# EAGLE board geiger (EAGLE 7.5.0)
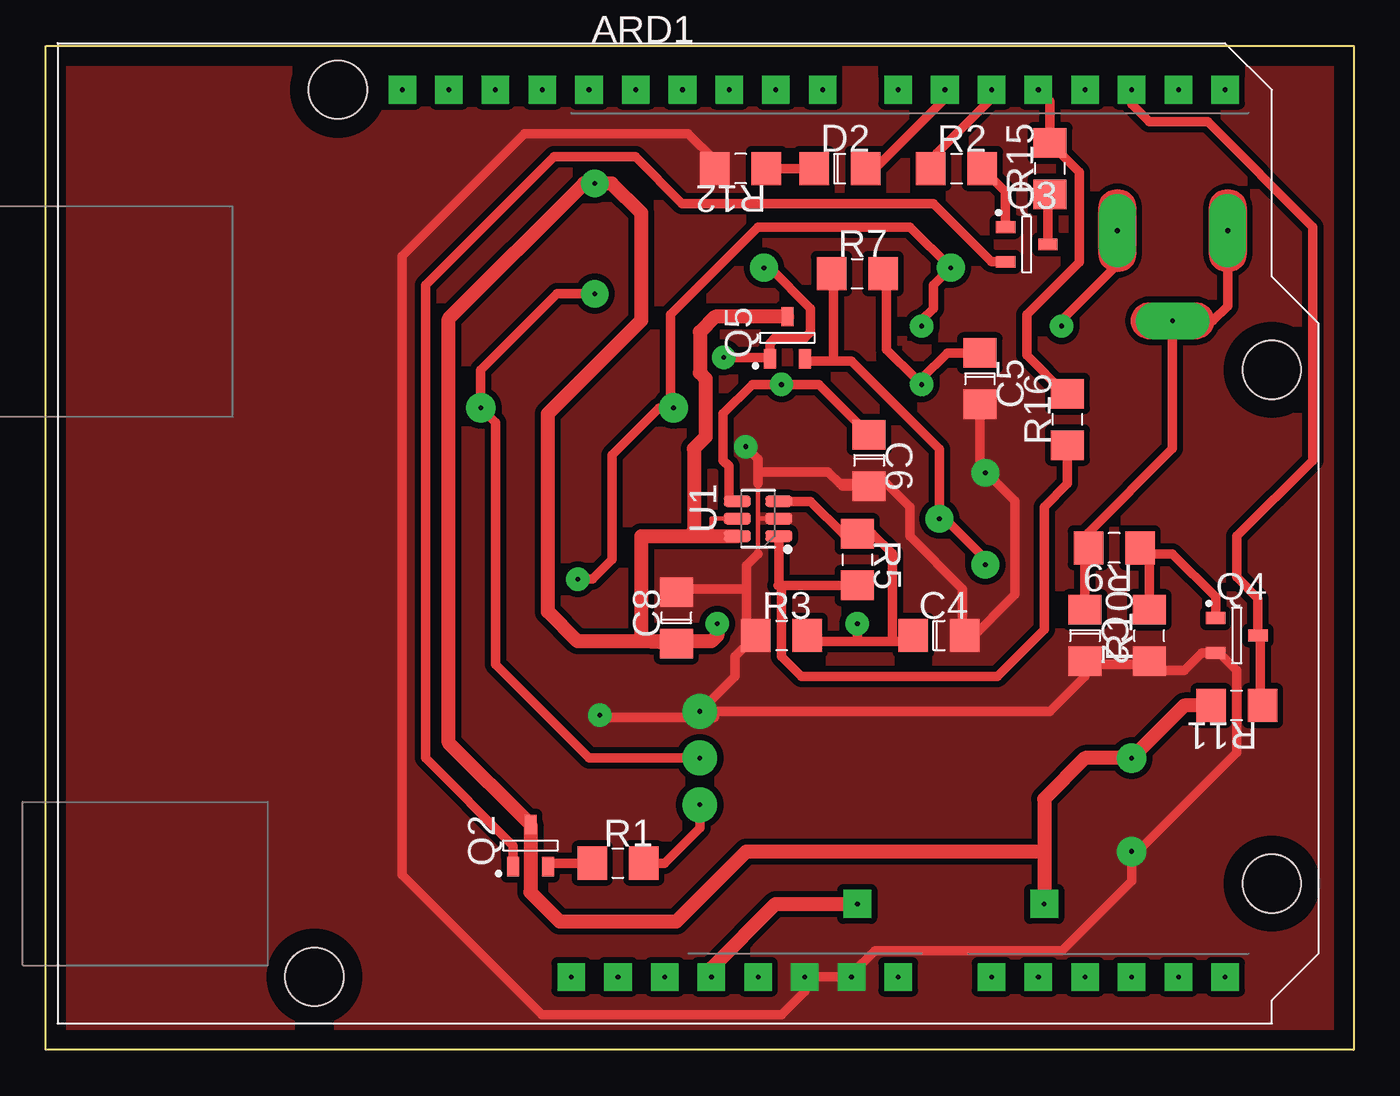
[diagram p0: board, top side]
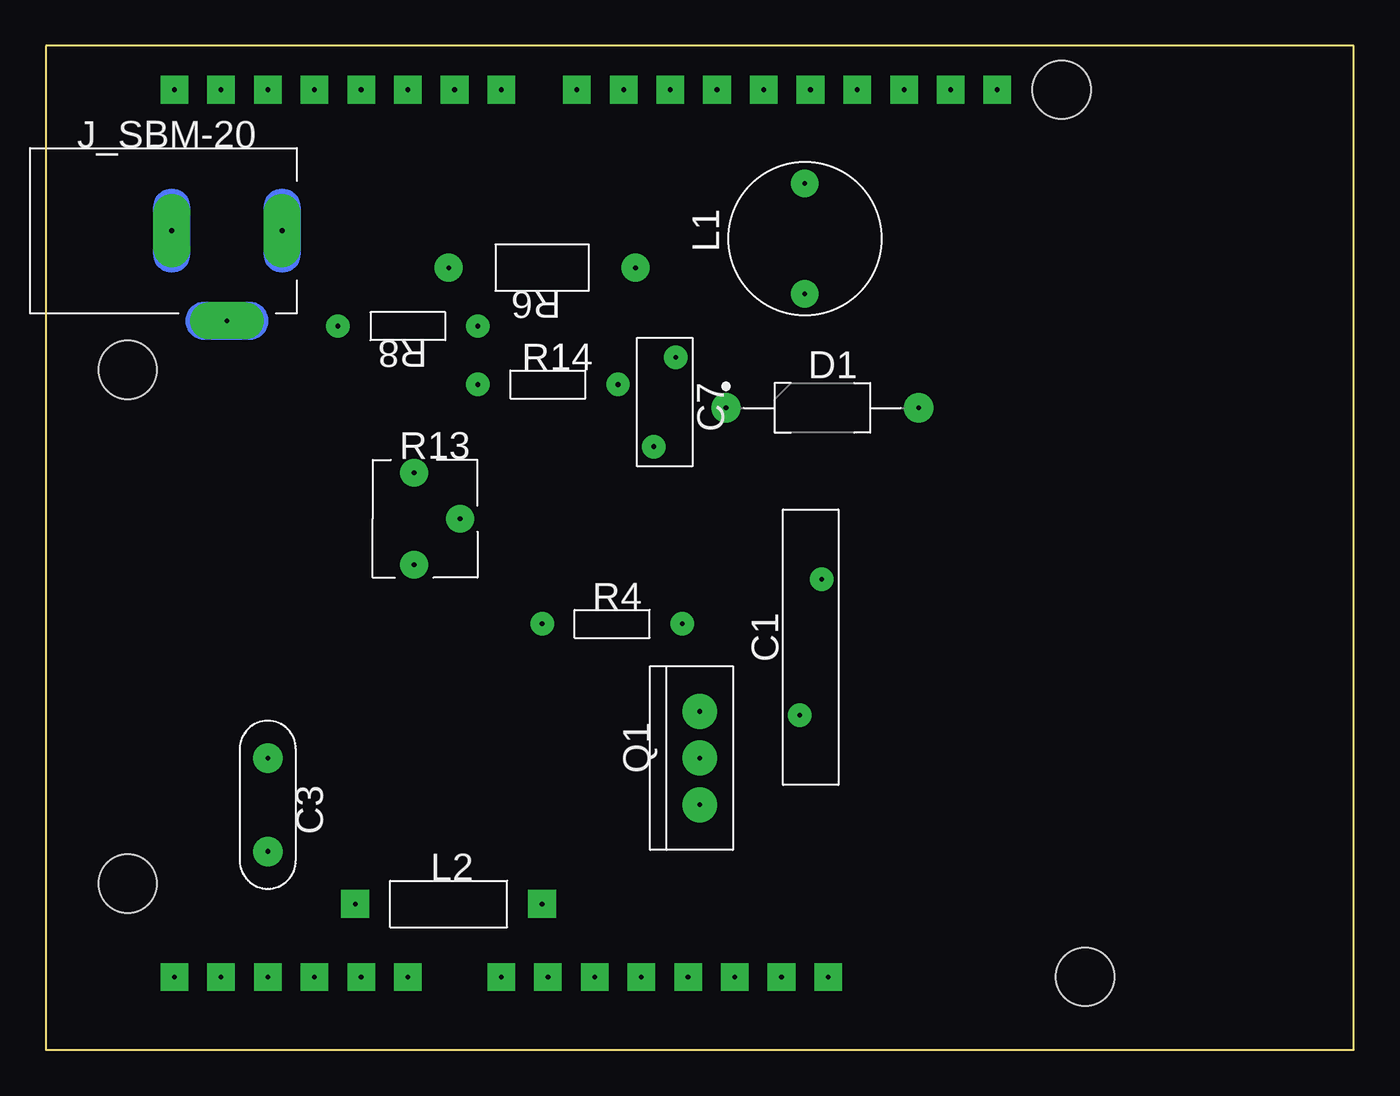
[diagram p1: board, bottom side, seen from below]

Size 71.12 x 54.61 mm. Coordinates in mm from the lower left corner, seen from the top.
Outline: 0,54.61 71.12,54.61 71.12,0 0,0 0,54.61
Copper layers (1*16): Top 0.035mm / dielectric 1.5mm / Bottom 0.035mm
Design rules "default *": minimum track width 10mil, minimum drill 0.61mm, track to track 8mil, track to pad 8mil, pad to pad 8mil, via to via 8mil, smd to smd 8mil, copper to edge 40mil, drill to drill 8mil, minimum pad ring 0mil, minimum via ring 8mil, stop-mask expansion 2mil, vias tented up to drill 19mil, thermal gap 10mil
Net classes: 0 Default: width 0.508 mm, clearance 0.33 mm, clearance 0.33 mm to class 1, clearance 0.33 mm to class 2; 1 VCC: width 0.762 mm, clearance 0.33 mm, clearance 0.33 mm to class 0, clearance 0.33 mm to class 2; 2 HI_VOLTAGE: width 0.508 mm, clearance 0.635 mm, clearance 0.635 mm to class 0, clearance 0.635 mm to class 1

## Footprints (pad centres in the part's own frame; a part is rotated, then mirrored left to right if it is on the bottom)
ADRUINO_UNO = drill 0.254 pad 1.5 square: 0 27.94,24.13; 1 25.4,24.13; 2 22.86,24.13; 3 20.32,24.13; 3.3V 0,-24.13; 4 17.78,24.13; 5 15.24,24.13; 5V 2.54,-24.13; 6 12.7,24.13; 7 10.16,24.13; 8 6.045,24.13; 9 3.505,24.13; 10 0.965,24.13; 11 -1.575,24.13; 12 -4.115,24.13; 13 -6.655,24.13; A0 15.24,-24.13; A1 17.78,-24.13; A2 20.32,-24.13; A3 22.86,-24.13; A4 25.4,-24.13; A5 27.94,-24.13; AREF -11.76,24.13; GND1 -9.195,24.13; GND2 5.08,-24.13; GND3 7.62,-24.13; IOREF -5.08,-24.13; N.C. -7.62,-24.13; RESET -2.54,-24.13; SCL -16.815,24.13; SDA -14.275,24.13; VIN 10.16,-24.13 | hole 3.175: -21.59,-24.13; -20.32,24.13; 30.48,-19.05; 30.48,8.89
CAPRB740W60L1500T300H1800 = drill 0.254 pad 1.28: 1 -3.702,0.6; 2 3.702,-0.6
CAP_1206 = smd 1.6 x 1.8: 1 -1.4,0; 2 1.4,0
CAP-5.08/9.15x3 = drill 0.254 pad 1.6: 1 -2.54,0; 2 2.54,0
CAPRB485W60L700T300H1000 = drill 0.254 pad 1.28: 1 -2.427,0.6; 2 2.427,-0.6
DIOAD1048W78L520D270_AD2 = drill 0.254 pad 1.59: 1 -5.24,0; 2 5.24,0
DIO_1206 = smd 1.6 x 1.8: 1 -1.4,0; 2 1.4,0
4840-2211 = drill 0.254 pad 2 long: 1 3,1.7; 2 -3,1.7; 3 0,-3.2
BOURNS_6100-100K = drill 0.254 pad 1.5: 1 -3,0; 2 3,0
IND_400 = drill 0.254 pad 1.524 square: 1 -5.08,0; 2 5.08,0
TO-220 = drill 0.254 pad 1.9: 1 -2.54,0; 2 0,0; 3 2.54,0
SOT23 = smd 1.05 x 0.65: 1 -1.15,0.95; 2 -1.15,-0.95; 3 1.15,0
RES_1206 = smd 1.6 x 1.8: 1 -1.4,0; 2 1.4,0
RES-7.62/4x1.5 = drill 0.254 pad 1.27: 1 -3.81,0; 2 3.81,0
RES-10.16/5.1x2.5 = drill 0.254 pad 1.524: 1 -5.08,0; 2 5.08,0
306X = drill 0.254 pad 1.5: 1 -1.25,2.5; 2 1.25,0; 3 -1.25,-2.5
SOT23-6P95_270X145L35X35M = smd 0.62 x 1.46: 1 -0.95,-1.125; 2 0,-1.125; 3 0.95,-1.125; 4 0.95,1.125; 5 0,1.125; 6 -0.95,1.125

## Placement (x,y rotation side)
ARD1  ARDUINO UNO  [ADRUINO_UNO]  36.2,28.1 0 top
C1  .005u  [CAPRB740W60L1500T300H1800]  29.53,21.91 90 bottom
C2  220pF  [CAP_1206]  56.52,22.54 270 top
C3  220u  [CAP-5.08/9.15x3]  59.06,13.33 270 bottom
C4  104  [CAP_1206]  48.58,22.54 0 top
C5  1n  [CAP_1206]  50.8,36.51 270 top
C6  1n  [CAP_1206]  44.77,32.07 270 top
C7  0.1uF  [CAPRB485W60L700T300H1000]  37.47,35.24 270 bottom
C8  1u  [CAP_1206]  34.29,23.49 90 top
D1  1N4937G  [DIOAD1048W78L520D270_AD2]  28.89,34.92 0 bottom
D2  LED_1206  [DIO_1206]  43.18,47.94 0 top
J_SBM-20  644456-2  [4840-2211]  61.28,42.86 360 bottom
L1  6100-103K-RC  [BOURNS_6100-100K]  29.85,44.13 90 bottom
L2  100nH  [IND_400]  49.21,7.94 0 bottom
Q1  FJP5027RTU  [TO-220]  35.56,15.87 90 bottom
Q2  MMBT3904  [SOT23]  26.35,11.11 90 top
Q3  MMBT3904  [SOT23]  53.34,43.82 0 top
Q4  MMBT3904  [SOT23]  64.77,22.54 0 top
Q5  MMBT3904  [SOT23]  40.32,38.74 90 top
R1  220  [RES_1206]  31.12,10.16 0 top
R2  100k  [RES_1206]  49.53,47.94 0 top
R3  100k  [RES_1206]  40.01,22.54 0 top
R4  100k  [RES-7.62/4x1.5]  40.32,23.18 360 bottom
R5  10M  [RES_1206]  44.13,26.67 270 top
R6  5GOhm  [RES-10.16/5.1x2.5]  44.13,42.54 180 bottom
R7  1M  [RES_1206]  44.13,42.23 0 top
R8  4.7M  [RES-7.62/4x1.5]  51.44,39.37 180 bottom
R9  22k  [RES_1206]  58.1,27.3 180 top
R10  100k  [RES_1206]  60.01,22.54 90 top
R11  10k  [RES_1206]  64.77,18.73 180 top
R12  220  [RES_1206]  37.78,47.94 180 top
R13  500k  [306X]  49.85,28.89 0 bottom
R14  1M  [RES-7.62/4x1.5]  43.82,36.19 360 bottom
R15  1k  [RES_1206]  54.61,47.94 90 top
R16  1  [RES_1206]  55.56,34.29 90 top
U1  OPA341NA  [SOT23-6P95_270X145L35X35M]  38.73,28.89 90 top

## Library data of the parts
ARD1 C2 C4-C6 C8 D2 R1-R5 R7-R12 R14-R16 U1 = common
C1 = common; DATASHEET: http://datasheets.diptrace.com/vishay/HAE.pdf; MANUFACTURER: Vishay; PART_NUMBER_(DIGI-KEY): HAE103MBABF0KR-ND; PART_NUMBER_(LCSC): C1638345; UNIQUE_NAME: VISHAY_HAE_7.5X1.2_15X3_CAP
C3 = common; UNIQUE_NAME: CAP-5.08/9.15x3
C7 = common; DATASHEET: http://datasheets.diptrace.com/vishay/HAE.pdf; MANUFACTURER: Vishay; PART_NUMBER_(DIGI-KEY): HAE102MBABF0KR-ND; PART_NUMBER_(LCSC): C1631824; UNIQUE_NAME: VISHAY_HAE_5X1.2_7X3_CAP
D1 = common; DATASHEET: http://datasheets.diptrace.com/on_semi/1n4933-d.pdf; MANUFACTURER: ON Semiconductor; PART_NUMBER_(DIGI-KEY): 1N4937GOS-ND; PART_NUMBER_(LCSC): C698667; UNIQUE_NAME: ONSEMI_59-10_DIO
J_SBM-20 = common; DATASHEET: http://datasheets.diptrace.com\con_headers\ENG_CD_644456_D2.pdf; MANUFACTURER: TE Connectivity
L1 = common; DATASHEET: https://www.mouser.com/datasheet/2/54/6100_series-776994.pdf; MANUFACTURER: Pulse Electronics; PART_NUMBER_(DIGI-KEY): M9952-ND; PART_NUMBER_(LCSC): C1334172; UNIQUE_NAME: PULSE_RL824
L2 = common; UNIQUE_NAME: IND_400
Q1 = common; DATASHEET: https://www.mouser.com/datasheet/2/916/PBHV2160Z-1526082.pdf
Q2-Q5 = common; DATASHEET: http://datasheets.diptrace.com\philips-nxp\MMBT3904.pdf; MANUFACTURER: Philips-NXP
R6 = common; UNIQUE_NAME: RES-10.16/5.1x2.5
R13 = common; DATASHEET: http://datasheets.diptrace.com\potentiometers\306.pdf; MANUFACTURER: CTS

## Nets
CTL: R5.2 R16.1 U1.1
GND: ARD1.GND2 ARD1.GND3 C1.1 C2.2 C3.2 C4.2 C5.2 C6.2 C7.2 C8.2 Q1.3 Q4.2 R3.1 R10.1 R12.2 R13.1 U1.2
Half_With_Histeresis: C4.1 R3.2 R4.1 R5.1 U1.3
HI [HI_VOLTAGE]: J_SBM-20.1 R8.2
HI_DANGER [HI_VOLTAGE]: C1.2 D1.1 R6.2 R8.1
Hi_Sensor: C6.1 R14.2 U1.4
Net_2: D1.2 L1.1 Q1.2
Net_3: Q2.1 Q3.2
Net_4: Q1.1 R1.2
Net_5: Q2.2 R1.1
Net_6: Q3.1 R2.2
Net_11: C7.1 Q5.1 R6.1
Net_12: C2.1 J_SBM-20.2 J_SBM-20.3 R9.2
Net_13: Q4.1 R9.1 R10.2
Net_16 [VCC]: ARD1.3.3V L2.2
Net_17: D2.1 R12.1
Net_18: ARD1.6 D2.2
Net_20: C5.1 R7.2 R14.1
Net_21: Q5.2 R7.1 R13.2 R13.3
Net_22: Q3.3 R15.1
Net_23: ARD1.4 R15.2 R16.2
NOUT: ARD1.2 Q4.3 R11.1
PWM: ARD1.5 R2.1
VCC [VCC]: C3.1 C8.1 L1.2 L2.1 Q2.3 Q5.3 R4.2 R11.2 U1.5 U1.6

## Tracks (layer width: path | path; a pad name or v marks a point on that pad's centre or on a via)
CTL
  Top 0.508: U1.1 39.86,25.31 39.82,25.27 R5.2 40.01,25.27 40.01,21.4 41.08,20.32 51.75,20.32 54.29,22.86 54.29,29.53 55.56,30.8 R16.1
GND
  Top 0.254: U1.2 38.73,28.89 | 38.73,28.89 38.73,26.99 | 38.73,28.89 38.73,30.8
  Top 0.508: Q1.3 36.04,18.41 36.35,18.1 30.13,18.1 C1.1 | ARD1.GND3 ARD1.GND2 41.28,3.17 40.01,1.9 26.99,1.9 19.37,9.52 19.37,43.18 26.04,49.85 34.93,49.85 36.38,48.39 R12.2 | ARD1.GND3 | ARD1.GND3 43.82,4.13 45.09,5.4 55.25,5.4 59.06,9.21 59.06,10.48 | 59.06,10.48 64.77,16.19 64.77,20.64 63.81,21.59 Q4.2 62.87,21.59 61.91,20.64 60.01,20.64 R10.1 60.01,20.95 56.52,20.95 C2.2 56.52,20.32 54.61,18.41 Q1.3 | C3.2 59.06,10.48 | Q1.3 37.47,20.32 37.47,21.4 R3.1 38.1,22.54 38.1,25.08 | 38.73,26.99 38.1,26.35 38.1,25.08 | 38.73,30.8 38.73,31.43 | 38.73,31.43 42.55,31.43 43.18,30.8 | 43.18,30.8 45.72,30.8 46.99,29.53 46.99,27.94 49.85,25.08 49.85,22.54 | 49.85,22.54 49.85,22.22 50.17,22.22 52.71,24.76 52.71,29.84 51.16,31.39 R13.1 51.1,31.77 50.8,32.07 C5.2 | C6.2 43.31,30.67 43.18,30.8 | C4.2 49.85,22.54 | C7.2 38.73,32.15 38.73,31.43 | C8.2 34.29,25.08 38.1,25.08
  pour Top (isolate 0.33, no thermals): 0.98,53.63 70.14,53.63 70.14,0.98 0.98,0.98
Half_With_Histeresis
  Top 0.508: U1.3 41.6,29.84 43.37,28.07 R5.1 44.96,28.07 46.04,26.99 46.04,22.22 44.13,22.22 | R3.2 41.41,22.22 44.13,22.22 | 44.13,22.22 R4.1 44.13,22.22 | 44.13,22.22 46.86,22.22 C4.1
HI
  Top 0.508: R8.2 55.25,39.69 58.28,42.72 J_SBM-20.1
HI_DANGER
  Top 0.508: C1.2 29.72,25.61 30.8,26.69 30.8,32.37 33.35,34.92 D1.1 33.97,34.92 33.97,40 38.73,44.77 46.99,44.77 R6.2 48.26,41.59 48.26,40.32 47.62,39.69 R8.1
Hi_Sensor
  Top 0.508: C6.1 42.04,36.19 R14.2 38.42,36.19 36.83,34.61 36.83,32.07 37.15,31.75 37.15,29.84 U1.4
Net_2
  Top 0.508: L1.1 27.8,41.13 23.65,36.99 D1.2 24.45,34.13 24.45,20.95 29.53,15.87 Q1.2
Net_3
  Top 0.508: Q2.1 25.4,11.11 20.64,15.87 20.64,41.59 27.62,48.58 32.07,48.58 34.61,46.04 48.26,46.04 51.43,42.86 Q3.2
Net_4
  Top 0.508: R1.2 33.66,10.16 35.56,12.06 Q1.1
Net_5
  Top 0.508: Q2.2 27.3,10.16 R1.1
Net_6
  Top 0.508: R2.2 52.19,46.68 Q3.1
Net_11
  Top 0.508: R6.1 39.37,42.54 41.59,40.32 41.59,39.05 41.28,38.73 39.69,38.73 39.37,38.42 Q5.1 39.37,37.47 39.17,37.67 C7.1
Net_12
  Top 0.508: C2.1 56.52,26.35 56.7,26.54 R9.2 56.7,28.13 61.28,32.7 J_SBM-20.3 63.48,39.66 64.28,40.46 J_SBM-20.2
Net_13
  Top 0.508: Q4.1 63.62,24.64 61.28,26.99 59.82,26.99 R9.1 60.01,27.3 R10.2
Net_16
  Top 0.762: ARD1.3.3V 36.2,4.44 39.69,7.94 L2.2
Net_17
  Top 0.508: D2.1 R12.1 | R12.1
Net_18
  Top 0.508: D2.2 45.09,47.94 48.9,51.75 ARD1.6
Net_20
  Top 0.508: 49.03,37.91 C5.1 49.03,37.91 | 49.03,37.91 47.62,36.51 | 47.62,36.51 R14.1 | 49.03,37.91 47.62,36.51 | 47.62,36.51 47.31,36.51 45.72,38.1 45.72,42.23 R7.2
Net_21
  Top 0.508: R13.3 51.1,26.69 48.9,28.89 R13.2 48.6,32.68 43.82,37.46 42.84,37.46 | R7.1 43.18,42.23 R7.1 | 41.27,37.46 Q5.2 41.39,37.46 42.84,37.46 | 42.84,37.46 42.84,42.12 R7.1
Net_22
  Top 0.508: Q3.3 54.49,46.42 R15.1
Net_23
  Top 0.508: ARD1.4 54.61,51.59 R15.2 56.2,47.75 56.2,42.86 53.34,40 53.34,37.78 55.43,35.69 R16.2
NOUT
  Top 0.508: R11.1 66.17,19.3 66.04,19.43 66.04,22.42 Q4.3 65.92,24.57 64.77,25.72 64.77,27.94 68.9,32.07 68.9,44.77 63.18,50.48 60.01,50.48 59.06,51.43 ARD1.2
PWM
  Top 0.508: ARD1.5 51.44,51.75 48.45,48.77 48.45,48.26 R2.1
VCC
  Top 0.254: U1.5 36.2,28.89 36.2,28.26 35.24,28.26
  Top 0.762: 36.51,22.54 R4.2 36.51,22.54 | 36.51,22.54 36.2,22.22 | 36.2,22.22 32.39,22.22 | 32.39,22.22 32.39,27.94 35.24,27.94 | 35.24,27.94 U1.6 | 36.51,22.54 36.2,22.22 | 36.2,22.22 28.92,22.22 27.31,23.84 27.31,34.61 32.39,39.69 32.39,45.52 30.77,47.13 L1.2 29.26,47.13 21.91,39.78 21.91,16.71 Q2.3 26.35,8.57 27.94,6.98 34.29,6.98 38.1,10.79 54.29,10.79 | 63.18,18.73 R11.2 61.91,18.73 C3.1 56.52,15.87 54.29,13.65 54.29,10.79 | 35.24,27.94 35.24,28.26 35.24,32.7 35.88,33.34 35.88,36.51 35.56,36.83 35.56,39.05 36.39,39.88 Q5.3 | C8.1 32.39,22.22 | 54.29,10.79 L2.1

## Text on the board
tPlace: ARD1 | D2 | R2 | R12 | R15 | Q3 | R7 | Q5 | C5 | C6 | R16 | U1 | R5 | R9 | Q4 | R3 | C4 | C2 | C8 | R10 | R11 | R1 | Q2
bPlace: J_SBM-20 | L1 | R6 | R8 | D1 | R14 | C7 | R13 | R4 | C1 | Q1 | C3 | L2